# Altium PCB layout_test_master.PcbDoc
Units mil, origin at the board's own origin, x right, y up, seen from the top; angles counter-clockwise.
Board outline 5905 x 3270 mil, 2 copper layers (Top Layer, Bottom Layer); 18 components, 13 nets, 81 pads, 8 vias.
Unrouted connection lines stored in the file: 1.
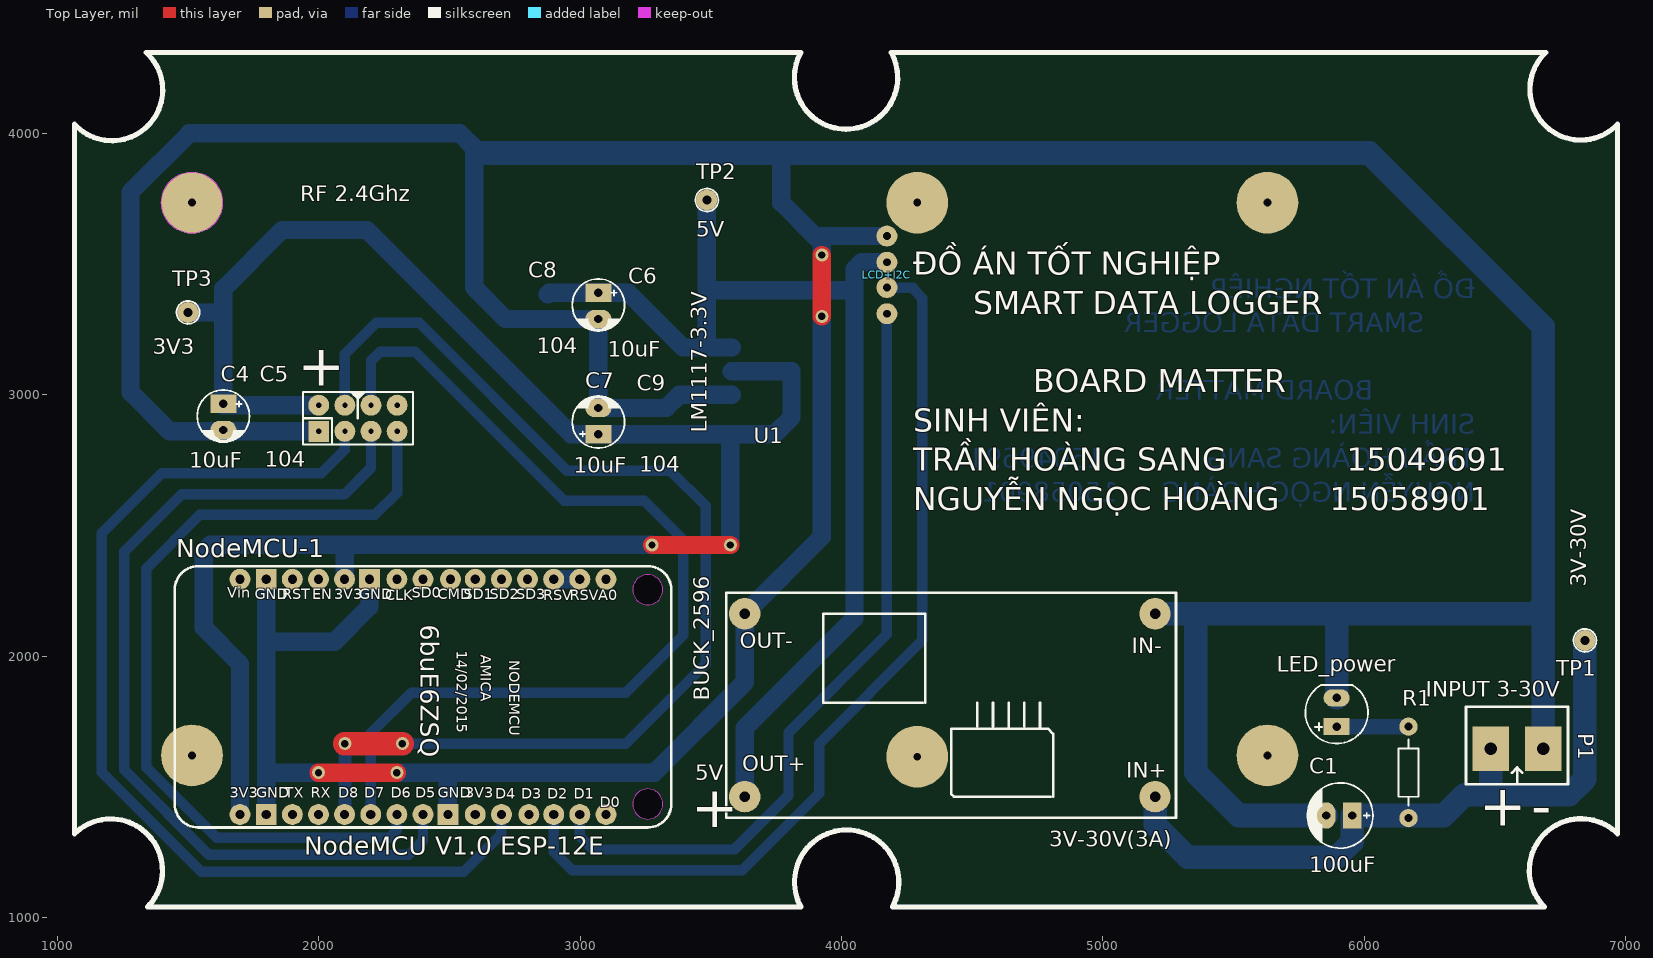
[diagram p0: Top Layer view]
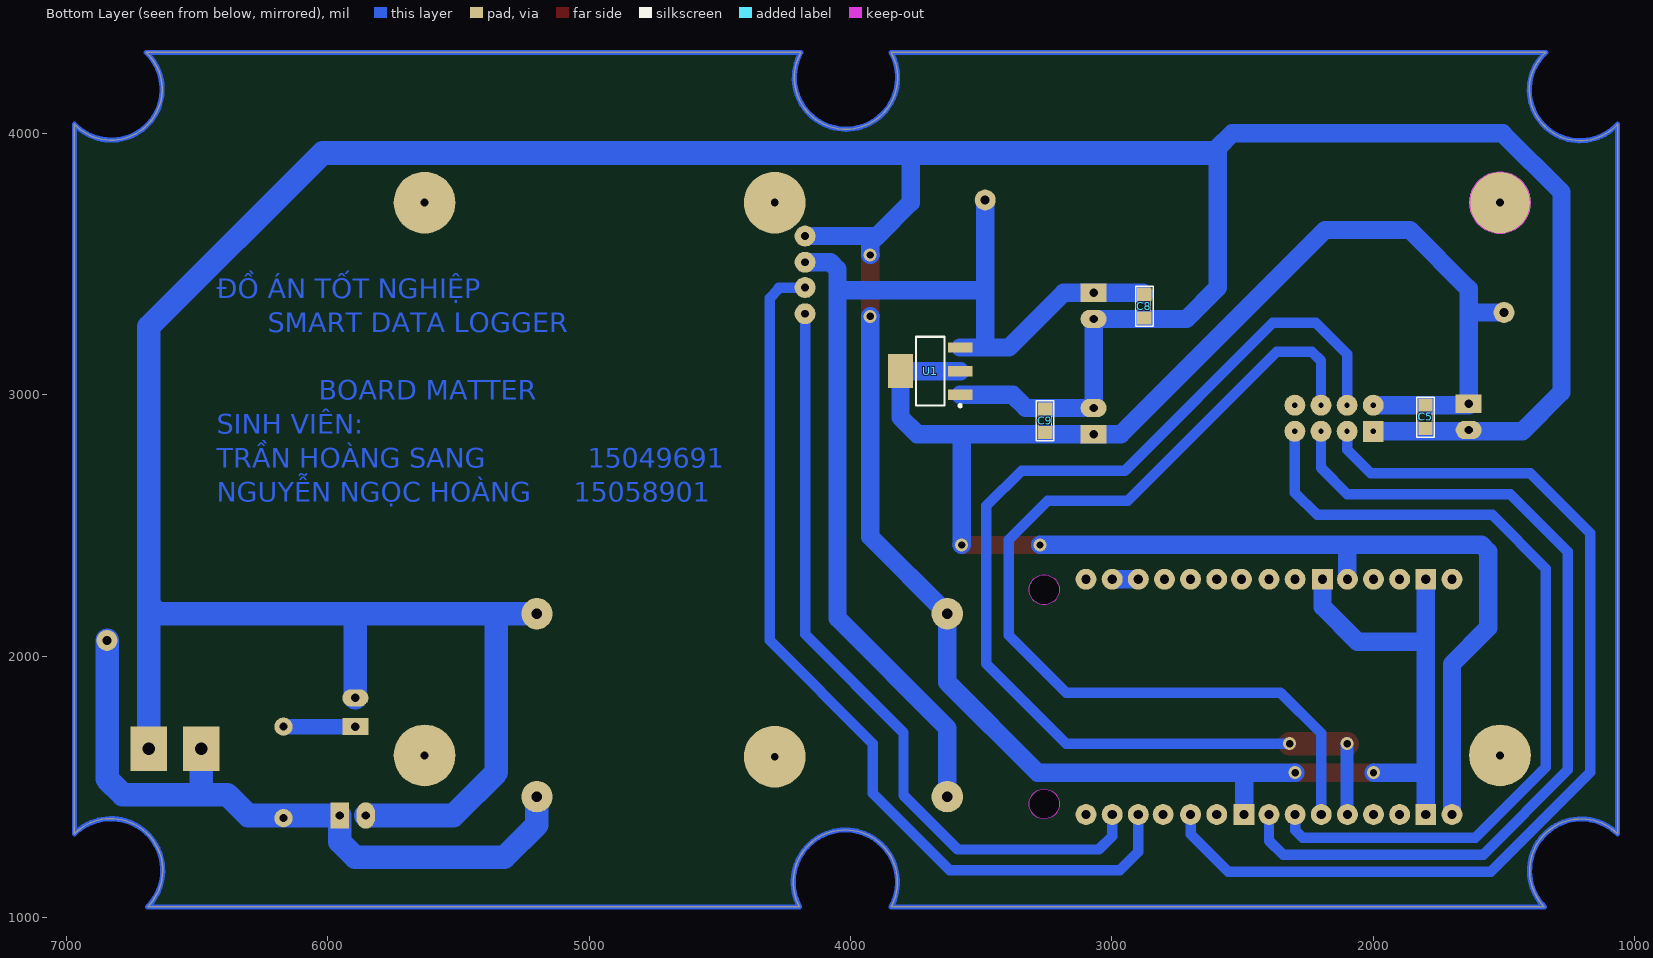
[diagram p1: Bottom Layer view, seen from below]
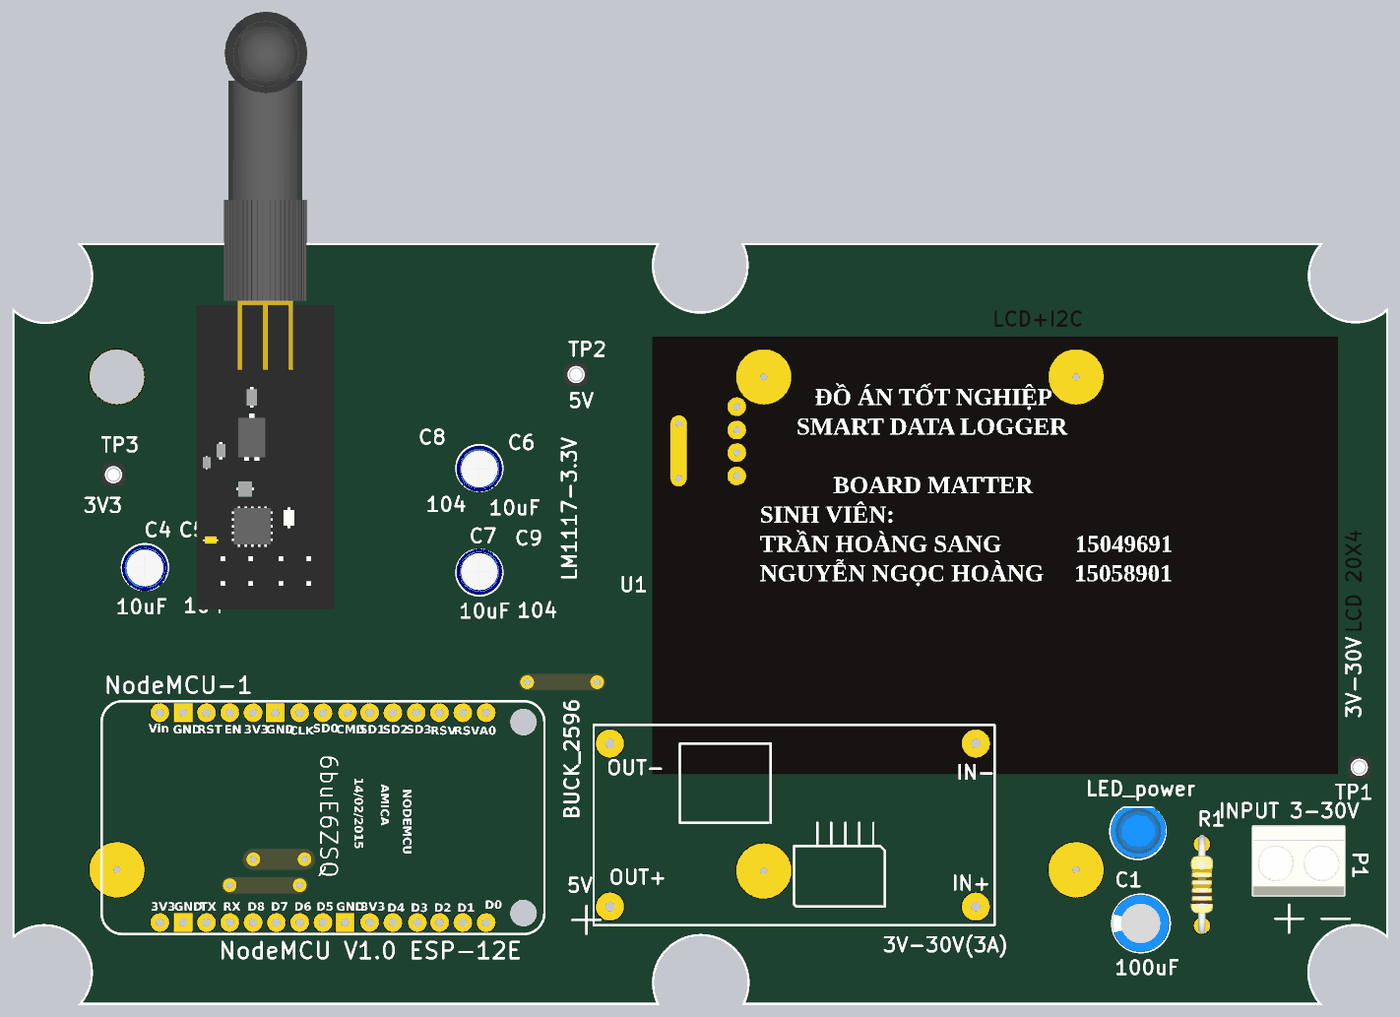
[diagram p2: 3D render of the assembled board from above, using the file's embedded part models]
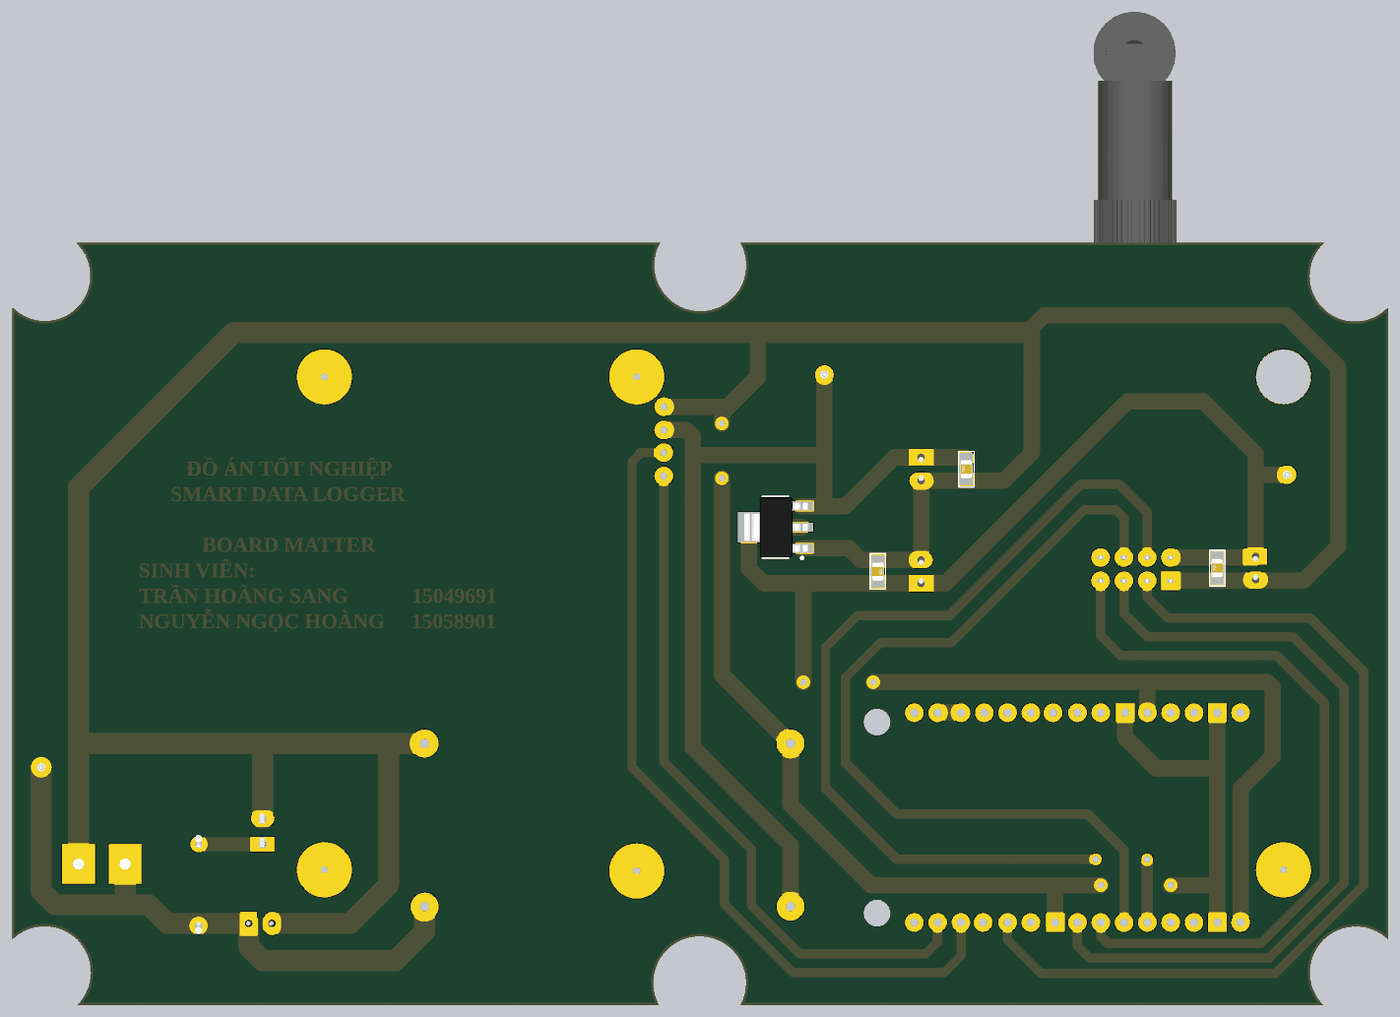
[diagram p3: 3D render of the assembled board from below, using the file's embedded part models]

## Layer stack, top to bottom
Top Solder: solder mask 0.4, Solder Resist, Dk 3.5
Top Layer: signal copper 1.4
Dielectric 1: dielectric 12.6, FR-4, Dk 4.8
Bottom Layer: signal copper 1.4
Bottom Solder: solder mask 0.4, Solder Resist, Dk 3.5

## Board outline
1345,1040 3845,1040 cw(c4020,1135.41) 4195,1040 6690,1040 cw(c6830.13,1179.86) 6970,1320 6970,4035 cw(c6828.88,4168.88) 6695,4310 4190.19,4310 cw(c4017.6,4213.8) 3845,4310 1340,4310 cw(c1208.36,4166.63) 1065,4035 1065,1320 cw(c1203.95,1178.94)
cut-out: 1515,3618.27 cw(c1515,3735) 1398.27,3735 cw(c1515,3735) 1515,3851.73 cw(c1515,3735) 1631.73,3735 cw(c1515,3735)

## Design rules (kind name [scope] priority, off if disabled: settings)
Clearance [All] p1: gap=10
PolygonConnect [All] p1: connectstyle=Relief reliefconductorwidth=10 reliefentries=4 polygonreliefangle="90 Angle" airgapwidth=10
RoutingVias [All] p1: holewidth=28 width=50 viastyle="Through Hole" minholewidth=28 minwidth=50 maxholewidth=28 maxwidth=50
SolderMaskExpansion [All] p1: expansion=4
Width [All] p1: maxlimit=90 minlimit=10 preferedwidth=30
30 further rules are at their usual default settings.

## Components (designator, comment, footprint, x,y, rotation, side; value= is the part's Value field where it differs from the comment)
3V-30V(3A) "BUCK_2596" BUCK_2596 4365,1780 r180 top (schematic designator *1)
C1 "100uF" CP1/2.5 5955,1390 r180 top
C4 "10uF" CP1/2 1635,2965 r270 top
C5 "104" SM-CAP-0805 1800,2870 r90 bottom
C6 "10uF" CP1/2 3070,3390 r270 top
C7 "10uF" CP1/2 3070,2849.17 r90 top
C8 "104" SM-CAP-0805 2876,3294.42 r90 bottom
C9 "104" SM-CAP-0805 3255,2945 r270 bottom
LCD+I2C "LCD 20X4" LCD2004+I2C 5270,2990 r0 top (schematic designator *LCD+I1)
LED_power "LED" LED-5-BLUE 5895,1785 r90 top
NodeMCU-1 "NodeMCU V1.0 ESP-12E" "NodeMCU V1.0 ESP-12E" 3345,2345 r270 top
P1 "INPUT 3-30V" "Medium - Header 2" 6585,1645 r180 top
R1 "1k" R1/4W 6170,1730 r270 top
"RF 2.4Ghz" "NRF24L01" NRF24L01A 2150,2910 r0 top
TP1 "3V-30V" TP1 6845,2060 r0 top
TP2 "5V" TP1 3485,3745 r270 top
TP3 "3V3" TP1 1500,3315 r0 top
U1 "LM1117-3.3V" SOT223 3695,3090 r90 bottom

## Footprints (in the part's own frame and the unit in brackets; to place one, negate y for a bottom-side part, rotate by r counter-clockwise, add the part's x,y. Pads: shape width x height; smd on the part's side, far side on the other; paste and mask are expansions set on the pad)
BUCK_2596 [mil]
  round 120 hole 40: 1(-835,318) 2(-835,-382) 3(735,-382) 4(735,318)
  silkscreen extent -915,-462 805,398
CP1/2 [mil] "Tu hoa < 22uF/16>50V"
  rect 70x100 hole 32: 1(0,0)
  oval 70x100 hole 32: 2(100,0)
  silkscreen extent -53,-100 146,100, body extent -49,-99 149,99, height 287
CP1/2.5 [mil] "Tu hoa 33 >100 uF,50V, 220uF/16V,25V"
  rect 70x100 hole 32: 1(0,0)
  oval 70x100 hole 32: 2(100,0)
  silkscreen extent -78,-125 172,125, body extent -76,-124 172,124, height 422
LCD2004+I2C [mil]
  round 80 hole 30: 0(-1096,320) 1(-1096,420) 2(-1096,517) 3(-1096,617)
  Top Solder keep-out region: -1097,138 486,138 486,873 -1097,873
LED-5-BLUE [mil] "LED 2 PIN, 5 ly , Only colour, pin to pin 110mil"
  rect 65x100 hole 32: 1(-55,0)
  oval 65x100 hole 32: 2(55,0)
  silkscreen extent -120,-120 104,120, body extent -113,-120 100,117, height 339
"Medium - Header 2" [mil]
  rect 140x170 hole 47.24: 1(-100,0) 2(100,0)
  silkscreen extent -195,-161 195,135, body extent -197,-160 197,135, height 394
"NodeMCU V1.0 ESP-12E" [mil]
  round 80 hole 115 unplated paste-300 mask-300: 0(91,-86) 0(911,-86)
  round 80 hole 35: 3V3(51,-1246) 3V3(951,-746) 3V3(951,-1646) A0(51,-246) CLK(51,-1046) CMD(51,-841) D0(951,-246) D1(951,-346) D2(951,-446) D3(951,-541) D4(951,-646) D5(951,-946) D6(951,-1046) D7(951,-1146) D8(951,-1246) EN(51,-1346) RST(51,-1446) RSV(51,-346) RSV(51,-446) RX(951,-1346) SD0(51,-946) SD1(51,-746) SD2(51,-646) SD3(51,-546) TX(951,-1446) VIN(51,-1646)
  rect 80x80 hole 35: GND(51,-1151) GND(51,-1546) GND(951,-851) GND(951,-1546)
  Keep-Out Layer circle w2: c911,-86 r57.5
  Keep-Out Layer circle w2: c91,-86 r57.5
  silkscreen extent 1,-1896 1001,4
NRF24L01A [mil] "With Anten"
  rect 80x80 hole 20: 1(-150,-50)
  round 80 hole 20: 2(-50,-50) 3(50,-50) 4(150,-50) 5(150,50) 6(50,50) 7(-50,50) 8(-150,50)
  silkscreen extent -210,-100 210,100, body extent -295,-172 298,2392, height 3766
R1/4W [mil] "R 1/4W, 2 Pin, 350mil"
  round 70 hole 31: 1(0,0) 2(350,0)
  silkscreen extent 48,-38 302,38, body extent -40,-47 386,47, height 111
SM-CAP-0805 [mil]
  rect 50x55 smd: 1(0,0) 2(90,0)
  silkscreen extent -32,-34 121,33, body extent 6,-25 84,25, height 31
SOT223 [mm]
  rect 1x2.4 smd: 1(-2.3,-2.9) 2(0,-2.9) 3(2.3,-2.9)
  rect 3.3x2.4 smd: 4(0,2.9)
  silkscreen extent -3.47,-3.02 3.35,1.4, body extent -3.25,-3.56 3.25,3.4, height 1.68
TP1 [mil] "Test point"
  round 80 hole 35: 1(0,0)
  silkscreen extent -44,-44 44,44, body extent -50,-50 50,50, height 178

## Part data
C1: library part CP2, "C 47uF/50V , 220uF/16V"
C4 C6 C7: library part CP1, "Cap P  0,1uF < 22uF , 16 - 50V"
C5 C8 C9: library part CN
LCD+I2C: library part i2c+lcd2004
LED_power: "LED Single colour Green and Red"
NodeMCU-1: "NodeMCU V1.0 ESP8266 (ESP-12E)"
P1: library part "Header 2 - M", "Header, 2-Pin, Medium"
R1: library part R1/4W, "Resistor 1/4W"
TP1 TP2 TP3: library part TP1, "Test Point"
U1: library part LM1117, "800mA Low-Dropout Linear Regulator"

## Free pads (board coordinates)
  round 236.22 hole 30: 2(1515,1620) 2(1515,3735) 2(4290,1615) 2(4290,3735) 2(5630,1620) 2(5630,3735)

## Via types
v1: diameter 50, hole 28, Top Layer to Bottom Layer, 8 vias

## Nets (pads, with @x,y where several pads share a name; then routed paths per layer and width w, separated by ;. In a path a pad name is that pad's centre, name@x,y a point inside that pad or via, vN(x,y) a via of type N, cw(c..) or ccw(c..) an arc to the next point about the centre after c; other vN are vias at no path point)
3V3: "RF 2.4Ghz.8" C4.1 C5.2 C7.1 C9.2 NodeMCU-1.3V3 TP3.1 U1.2 U1.4 | length 7627.8
  Top Layer w70: v1(3275,2425) v1(3575,2425)
  Bottom Layer w70: TP3.1 1620,3315 1635,3330 ; NodeMCU-1.3V3@1699,1394 1699,1970 1560.53,2108.47 1560.53,2400.53 1586,2426 2105,2426 ; 2000,2960 1635,2960 1635,3330 ; NodeMCU-1.3V3@2099,2294 2099,2420 2105,2426 ; v1(3275,2425) 3274,2426 2105,2426 ; v1(3575,2425) 3575,2834.17 3560,2849.17 ; U1.2 U1.4 3809.17,2913.35 3745,2849.17 3560,2849.17 ; 1635,3330 1635,3405 1860,3630 2184.17,3630 2965,2849.17 C7.1 3560,2849.17
5V: 3V-30V(3A).4 C6.1 C8.2 LCD+I2C.2 TP2.1 U1.3 | length 4254.6
  Bottom Layer w70: C8.2 2881.58,3390 C6.1 3185,3390 3394.45,3180.55 3485,3180.55 ; TP2.1 3485,3400 ; U1.3 3485,3180.55 ; 3630,1462 3630,1725 4050,2145 4050,3390 ; LCD+I2C.2 4077,3507 4050,3480 4050,3390 ; 3485,3180.55 3485,3400 ; 3485,3400 4040,3400 4050,3390
GND: 3V-30V(3A).2 3V-30V(3A).3 "RF 2.4Ghz.1" C1.2 C4.2 C5.1 C6.2 C7.2 C8.1 C9.1 LCD+I2C.3 LED_power.2 NodeMCU-1.GND P1.1 U1.1 | length 19952.3
  Top Layer w70: v1(1999,1554) v1(2299,1554) ; v1(3925,3300) v1(3925,3535)
  Bottom Layer w70: NodeMCU-1.GND@1799,1394 1799,1554 ; NodeMCU-1.GND@1799,2294 1799,2055 ; v1(1999,1554) 1799,1554 ; 2000,2860 1430,2860 1280,3010 1280,3775 1505,4000 2540,4000 2595,3945 2595,3410 2715,3290 C6.2 C7.2 3329.17,2949.17 3379.45,2999.45 U1.1 ; NodeMCU-1.GND@2194,2294 2194,2189 2060,2055 1799,2055 ; v1(2299,1554) 2494,1554 ; NodeMCU-1.GND@2494,1394 2494,1554 ; 3775,3925 3770,3920 3770,3735 3898,3607 ; v1(3925,3300) 3925,2457 3630,2162 3630,1900 3284,1554 2494,1554 ; v1(3925,3535) 3925,3580 3898,3607 ; LCD+I2C.3 3898,3607 ; 1799,1554 1799,2055
  Bottom Layer w90: 2615,3925 3775,3925 6020,3925 6685,3260 6685,2195 ; 5200,2162 5365,2162 ; C1.2 5520,1390 5355,1555 5355,2152 5365,2162 ; LED_power.2 5895,2157 5890,2162 ; P1.1 6685,2195 ; 5365,2162 5890,2162 ; 5890,2162 6652,2162 6685,2195
Net*1_1: 3V-30V(3A).1 C1.1 P1.2 R1.2 TP1.1 | length 2702
  Bottom Layer w90: 5200,1462 5200,1355 5325,1230 5895,1230 5955,1290 C1.1 6305,1390 6385,1470 6460,1470 ; P1.2 6485,1495 6460,1470 ; TP1.1 6845,1530 6785,1470 6460,1470
Net*LCD+I1_0: LCD+I2C.0 NodeMCU-1.D1 | length 2987
  Bottom Layer w40: NodeMCU-1.D1 2999,1311 3050,1260 3590,1260 3797.5,1467.5 3797.5,1707.5 4174,2084 LCD+I2C.0
Net*LCD+I1_1: LCD+I2C.1 NodeMCU-1.D2 | length 3524.7
  Bottom Layer w40: NodeMCU-1.D2 2899,1251 2970,1180 3620,1180 3915,1475 3915,1665 4310,2060 4310,3370 4275,3405 4275,3410 LCD+I2C.1
NetLED_power_1: LED_power.1 R1.1 | length 275
  Bottom Layer w60: LED_power.1 R1.1
NetNodeMCU-1_D4: "RF 2.4Ghz.2" NodeMCU-1.D4 | length 3868.6
  Bottom Layer w40: 2100,2860 2100,2790 2010,2700 1400,2700 1170,2470 1170,1555 1550,1175 2555,1175 2699,1319 NodeMCU-1.D4
NetNodeMCU-1_D5: "RF 2.4Ghz.3" NodeMCU-1.D5 | length 3453.5
  Bottom Layer w40: 2200,2860 2200,2720 2100,2620 1475,2620 1255,2400 1255,1565 1580,1240 2345,1240 2399,1294 NodeMCU-1.D5
NetNodeMCU-1_D6: "RF 2.4Ghz.4" NodeMCU-1.D6 | length 3218
  Bottom Layer w40: NodeMCU-1.D6 2299,1334 2270,1305 1610,1305 1340,1575 1340,2335 1545,2540 2215,2540 2300,2625 2300,2860
NetNodeMCU-1_D7: "RF 2.4Ghz.6" NodeMCU-1.D7 | length 3704.5
  Bottom Layer w40: NodeMCU-1.D7 2199,1704 2355,1860 3175,1860 3395,2080 3395,2445 3245,2595 2940,2595 2370,3165 2235,3165 2200,3130 2200,2960
NetNodeMCU-1_D8: "RF 2.4Ghz.7" NodeMCU-1.D8 | length 4297.4
  Top Layer w90: v1(2100,1665) v1(2320,1665)
  Bottom Layer w40: 2100,2960 2100,3155 2220,3275 2385,3275 2950,2710 3345,2710 3480,2575 3480,1970 3175,1665 v1(2320,1665)
  Bottom Layer w50: NodeMCU-1.D8 2100,1395 v1(2100,1665)
NetNodeMCU-1_RSV: NodeMCU-1.RSV | length 100
  Bottom Layer w70: NodeMCU-1.RSV@2899,2294 NodeMCU-1.RSV@2999,2294
pads on no net: "RF 2.4Ghz.5" NodeMCU-1.0 NodeMCU-1.A0 NodeMCU-1.CLK NodeMCU-1.CMD NodeMCU-1.D0 NodeMCU-1.D3 NodeMCU-1.EN NodeMCU-1.RST NodeMCU-1.RX NodeMCU-1.SD0 NodeMCU-1.SD1 NodeMCU-1.SD2 NodeMCU-1.SD3 NodeMCU-1.TX NodeMCU-1.VIN
copper on no net: | length 19571.7
  Bottom Layer w20: 1065,1320 cw(c1203.95,1178.94) 1345,1040 3845,1040 cw(c4020,1135.41) 4195,1040 6690,1040 cw(c6830.13,1179.86) 6970,1320 6970,4035 cw(c6828.88,4168.88) 6695,4310 4190.19,4310 cw(c4017.6,4213.8) 3845,4310 1340,4310 cw(c1208.36,4166.63) 1065,4035 1065,1320

## Other copper
Bottom Layer:
  text "ĐỒ ÁN TỐT NGHIỆP   /       SMART DATA LOGGER /        /             BOARD MATTER / SINH VIÊN: / TRẦN HOÀNG SANG            15049691 / NGUYỄN NGỌC HOÀNG     15058901" at 6425,2565 h130

## Silkscreen, mask and mechanical layers (free items; w line width, h text height)
Top Overlay:
  the board outline again, w20
  text "+" at 1920,3035 h157.48
  text "ĐỒ ÁN TỐT NGHIỆP   /       SMART DATA LOGGER /        /             BOARD MATTER / SINH VIÊN: / TRẦN HOÀNG SANG            15049691 / NGUYỄN NGỌC HOÀNG     15058901" at 4275,2530 h150
  text "5V" at 3440,1525 h60
  text "+" at 6440,1350 h157.48
  text "-" at 6640,1350 h157.48
  text "+" at 3425,1345 h157.48

## Text inside footprints (layer, text, board x,y; h text height)
3V-30V(3A): Top Overlay "IN+" at 5090,1535 h60; Top Overlay "IN-" at 5110,2010 h60; Top Overlay "OUT+" at 3620,1560 h60; Top Overlay "OUT-" at 3610,2030 h60
NodeMCU-1: Top Overlay "14/02/2015" at 2515,2020 h70 r270; Top Overlay "AMICA" at 2606,2006 h70 r270; Top Overlay "NODEMCU" at 2716,1985 h70 r270; Top Overlay "6buE6ZSQ" at 2390,2120 h70 r270; Top Overlay "CLK" at 2255,2200 h70; Top Overlay "SD0" at 2355,2210 h70; Top Overlay "SD1" at 2555,2205 h70; Top Overlay "SD2" at 2655,2205 h70; Top Overlay "SD3" at 2755,2205 h70; Top Overlay "RSV" at 2860,2200 h70; Top Overlay "RSV" at 2960,2200 h70; Top Overlay "A0" at 3070,2200 h70; Top Overlay "D5" at 2370,1445 h70; Top Overlay "GND" at 2455,1445 h70; Top Overlay "3V3" at 2560,1445 h70; Top Overlay "D4" at 2675,1440 h70; Top Overlay "D3" at 2775,1440 h70; Top Overlay "D2" at 2875,1440 h70; Top Overlay "D1" at 2975,1440 h70; Top Overlay "CMD" at 2455,2205 h70; Top Overlay "D6" at 2275,1445 h70; Top Overlay "3V3" at 1660,1445 h70; Top Overlay "GND" at 1760,1445 h70; Top Overlay "TX" at 1870,1445 h70; Top Overlay "RX" at 1970,1445 h70; Top Overlay "D8" at 2075,1445 h70; Top Overlay "D7" at 2175,1445 h70; Top Overlay "Vin" at 1650,2210 h70; Top Overlay "GND" at 1755,2205 h70; Top Overlay "RST" at 1860,2205 h70; Top Overlay "EN" at 1975,2205 h70; Top Overlay "3V3" at 2060,2205 h70; Top Overlay "GND" at 2155,2205 h70; Top Overlay "D0" at 3075,1475 h70 r180